# Altium PCB Device.PcbDoc (part 2 of 2)
Units mil, origin at the board's own origin, x right, y up, seen from the top; angles counter-clockwise.
Board outline 1614.17 x 1181.1 mil, 2 copper layers (Top Layer, Bottom Layer); 72 components, 59 nets, 280 pads, 52 vias.
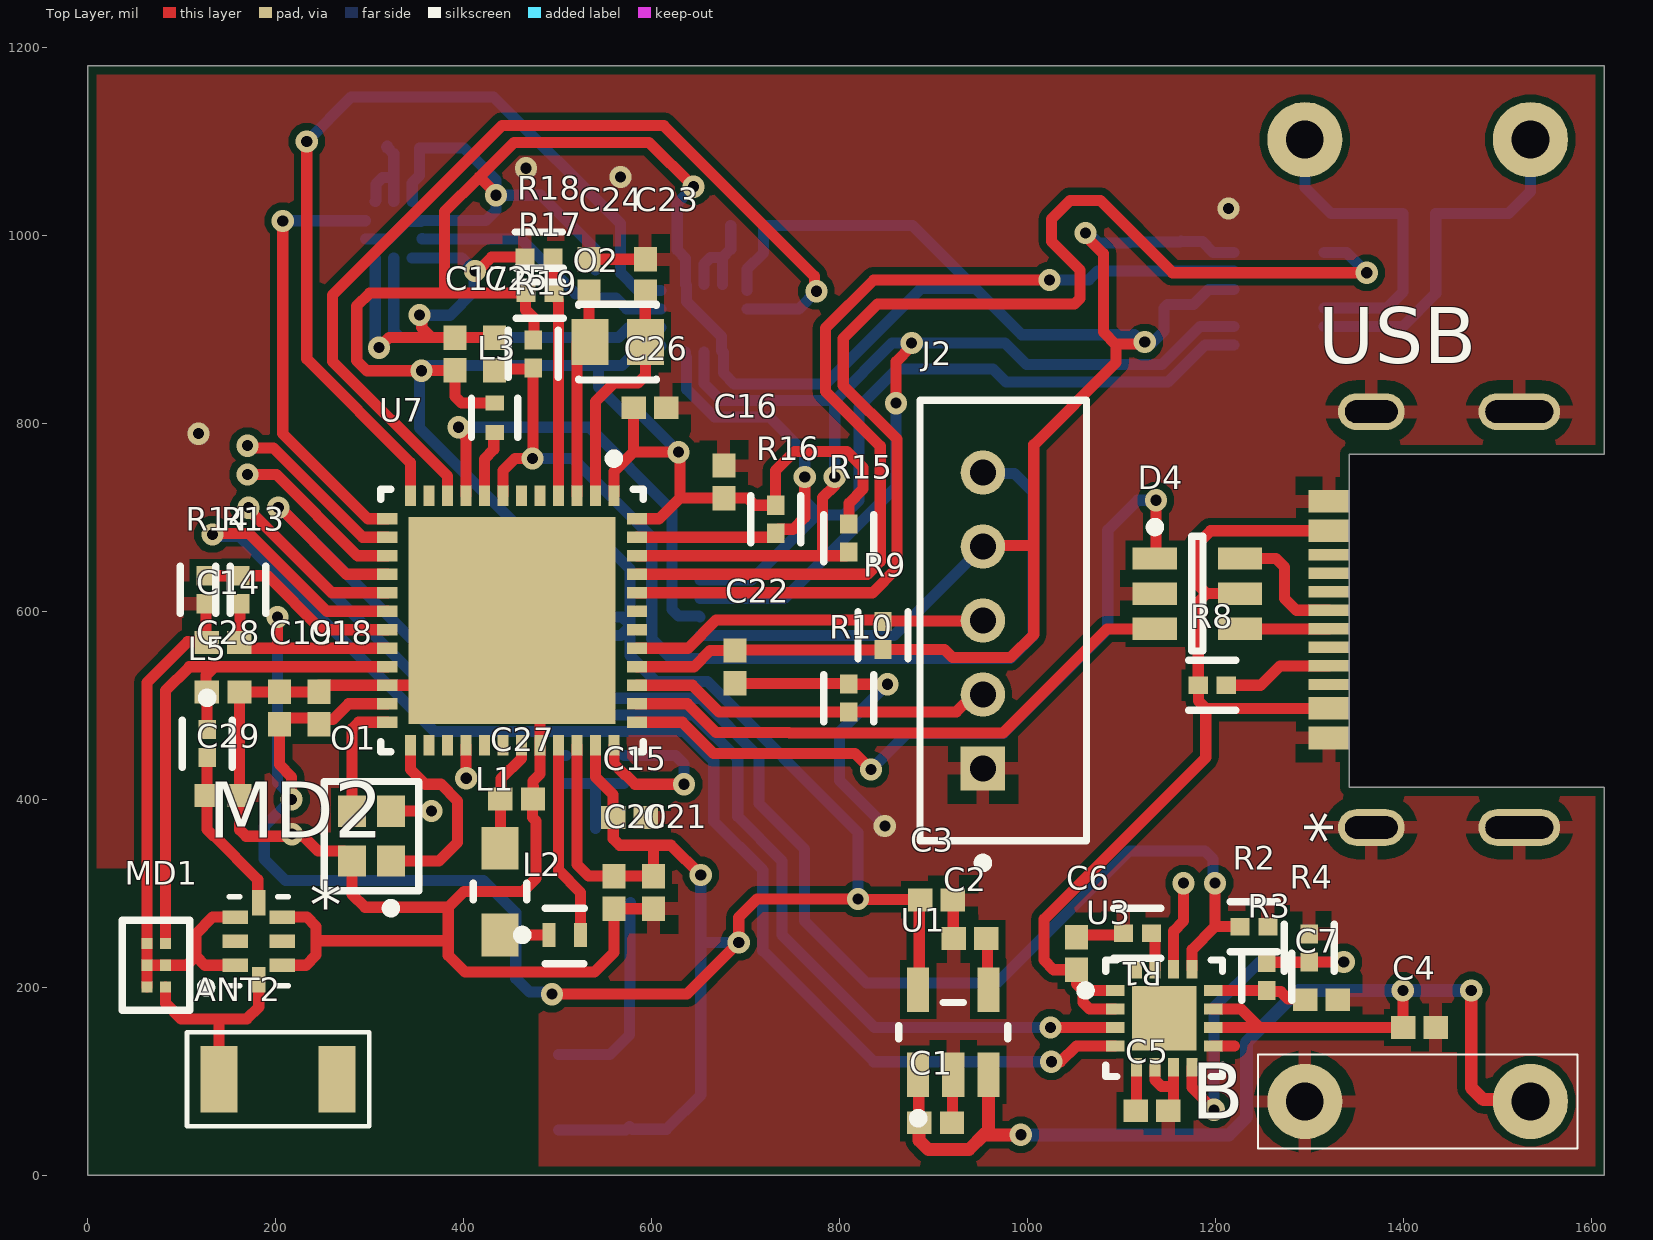
[diagram p0: Top Layer view]

## Via types
v1: diameter 23.62, hole 11.81, Top Layer to Bottom Layer, 52 vias

## Nets (pads, with @x,y where several pads share a name; then routed paths per layer and width w, separated by ;. In a path a pad name is that pad's centre, name@x,y a point inside that pad or via, vN(x,y) a via of type N, cw(c..) or ccw(c..) an arc to the next point about the centre after c; other vN are vias at no path point) (continued)
NetU4_7: (continued)
  Bottom Layer w11.81: v1(207.68,1015.75) 207.92,1015.99 295.52,1015.99 U4.7
NetU5_4: U5.4 U7.12 | length 934.9
  Top Layer w11.81: v1(233.27,1100.39) 233.27,868.65 343.5,758.41 U7.12
  Bottom Layer w11.81: v1(233.27,1100.39) 280.51,1147.64 432.09,1147.64 566.93,1012.8 566.93,960.63 585.63,941.93 U5.4
NetU5_9: U5.9 U7.10 | length 1016.1
  Top Layer w11.81: U7.10 382.87,744.09 260.83,866.14 260.83,937.01 440.94,1117.13 613.13,1117.13 773.38,956.87 773.38,943.15 v1(775.59,940.94)
  Bottom Layer w11.81: U5.9 756.89,922.24 v1(775.59,940.94)
NetU6_1: U6.1 U7.44 | length 1352.4
  Top Layer w11.81: U7.44 835.09,620.08 861.22,646.2 861.22,783.52 804.13,840.61 804.13,890.75 840.55,927.17 1050.2,927.17 1056.1,933.07 1056.1,963.58 1025.59,994.09 1025.59,1017.69 1045.3,1037.4 1077.76,1037.4 1154.53,960.63 v1(1361.22,960.63)
  Bottom Layer w11.81: U6.1 1339.57,982.28 v1(1361.22,960.63)
NetU7_5: U7.5
NetU7_6: U7.6
NetU7_11: U7.11
NetU7_14: U7.14 | length 189
  Top Layer w11.81: v1(170.28,776.57) 172.54,774.31 197.68,774.31 292.86,679.13 U7.14
NetU7_15: U7.15 | length 184.5
  Top Layer w11.81: v1(170.28,746.06) 200.87,746.06 287.49,659.45 U7.15
NetU7_28: U7.28 | length 36.1
  Top Layer w11.81: U7.28 402.56,423.17 v1(403.02,422.71) v1@403.02,421.78
NetU7_29: U7.29
NetU7_30: U7.30
NetU7_42: U7.42
NetU7_43: U7.43
VBAT: B.1 C1.2 C4.2 U1.1 U1.3 U3.10 U3.11 | length 1321.9
  Top Layer w11.81: U1.1 884.55,106.59 C1.2@884.55,56.79 ; v1@990.85,41.05 v1(993.11,43.31) ; U3.10 1247.05,157.48 ; U3.11 1227.36,177.17 1247.05,157.48 ; C4.2@1398.03,155.51 1399.8,157.28 C4.2@1399.8,157.48 ; v1(1399.61,196.85) 1399.8,196.65 C4.2@1399.8,157.48 ; 1247.05,157.48 C4.2@1399.8,157.48
  Top Layer w13.78: C1.2@884.55,56.79 884.84,56.5 884.84,37.4 894.68,27.56 937.99,27.56 953.74,43.31 ; U1.3 958.66,48.23 953.74,43.31 ; v1(993.11,43.31) 953.74,43.31 ; v1(1472.44,196.85) 1472.44,93.5 1485.24,80.71 1533.46,80.71 B.1
  Bottom Layer w13.78: v1(993.11,43.31) 1214.57,43.31 1233.27,62.01 1233.27,141.73 1288.39,196.85 v1(1399.61,196.85) v1(1472.44,196.85)
VUSB: C6.1 D4.5 R8.1 U3.1 U3.2 USB.A4-B9 USB.B4-A9 | length 984.6
  Top Layer w11.81: U3.2 1066,177.17 1059.08,184.08 1059.08,196.85 ; U3.1 1059.08,196.85 ; D4.5 1190.94,619.09 ; USB.A4-B9 1189.96,497.05 ; USB.B4-A9 1194.91,686.05 1182.09,673.23 1182.09,627.95 1190.94,619.09 ; 1059.08,196.85 1052.17,203.77 C6.1 1028.15,218.9 1017.72,229.33 1017.72,272.64 1189.96,444.88 1189.96,497.05 ; 1189.96,497.05 1182.09,504.92 1182.09,521.51 R8.1 1181.95,610.1 1190.94,619.09
pads on no net: ANT2.2 MD2.2 MD2.6 U3.16 U3.17 U5.10 U5.11 U6.2 U6.3 U6.9 U6.13 U7.26 U7.27 USB.A8 USB.B5 USB.B6 USB.B7 USB.B8

## Polygon pours and split planes (outlines as drawn)
GND on Bottom Layer "GND_L02_P001" (solid, remove dead copper, pour order 1): 0,1181.1 1614.17,1181.1 1614.17,0 480.31,0 480.31,330.71 0,330.71
GND on Top Layer "GND_L01_P000" (solid, remove dead copper, pour order 0): 0,1181.1 1614.17,1181.1 1614.17,0 480.31,0 480.31,326.77 0,326.77

## Silkscreen, mask and mechanical layers (free items; w line width, h text height)
Mechanical 1:
  lines w10: 0,0 0,1181.1 1614.17,1181.1 1614.17,767.72 1377.95,767.72 1342.52,767.72 1342.52,413.39 1377.95,413.39 1614.17,413.39 1614.17,0 0,0

## Text inside footprints (layer, text, board x,y; h text height)
D2: Mechanical 13 "*" at 551.79,61.51 h50 r270; Bottom Overlay "*" at 551.79,2.82 h50 r270
MD2: Top Overlay "*" at 236.2,262.65 h50; Mechanical 13 "*" at 179.7,264.26 h50
USB: Top Overlay "*" at 1345.88,353.05 h50 r90; Mechanical 13 "*" at 1345.88,353.05 h50 r90